# Altium PCB triumvi_integrated.PcbDoc (part 2 of 2)
Units mil, origin at the board's own origin, x right, y up, seen from the top; angles counter-clockwise.
Board outline 3610.03 x 1060.03 mil, 6 copper layers (Top Layer, GND, Signal Layer 2, VCC, GND (Mid4), Bottom Layer), stack 48.468 mil thick; 157 components, 128 nets, 572 pads, 236 vias.
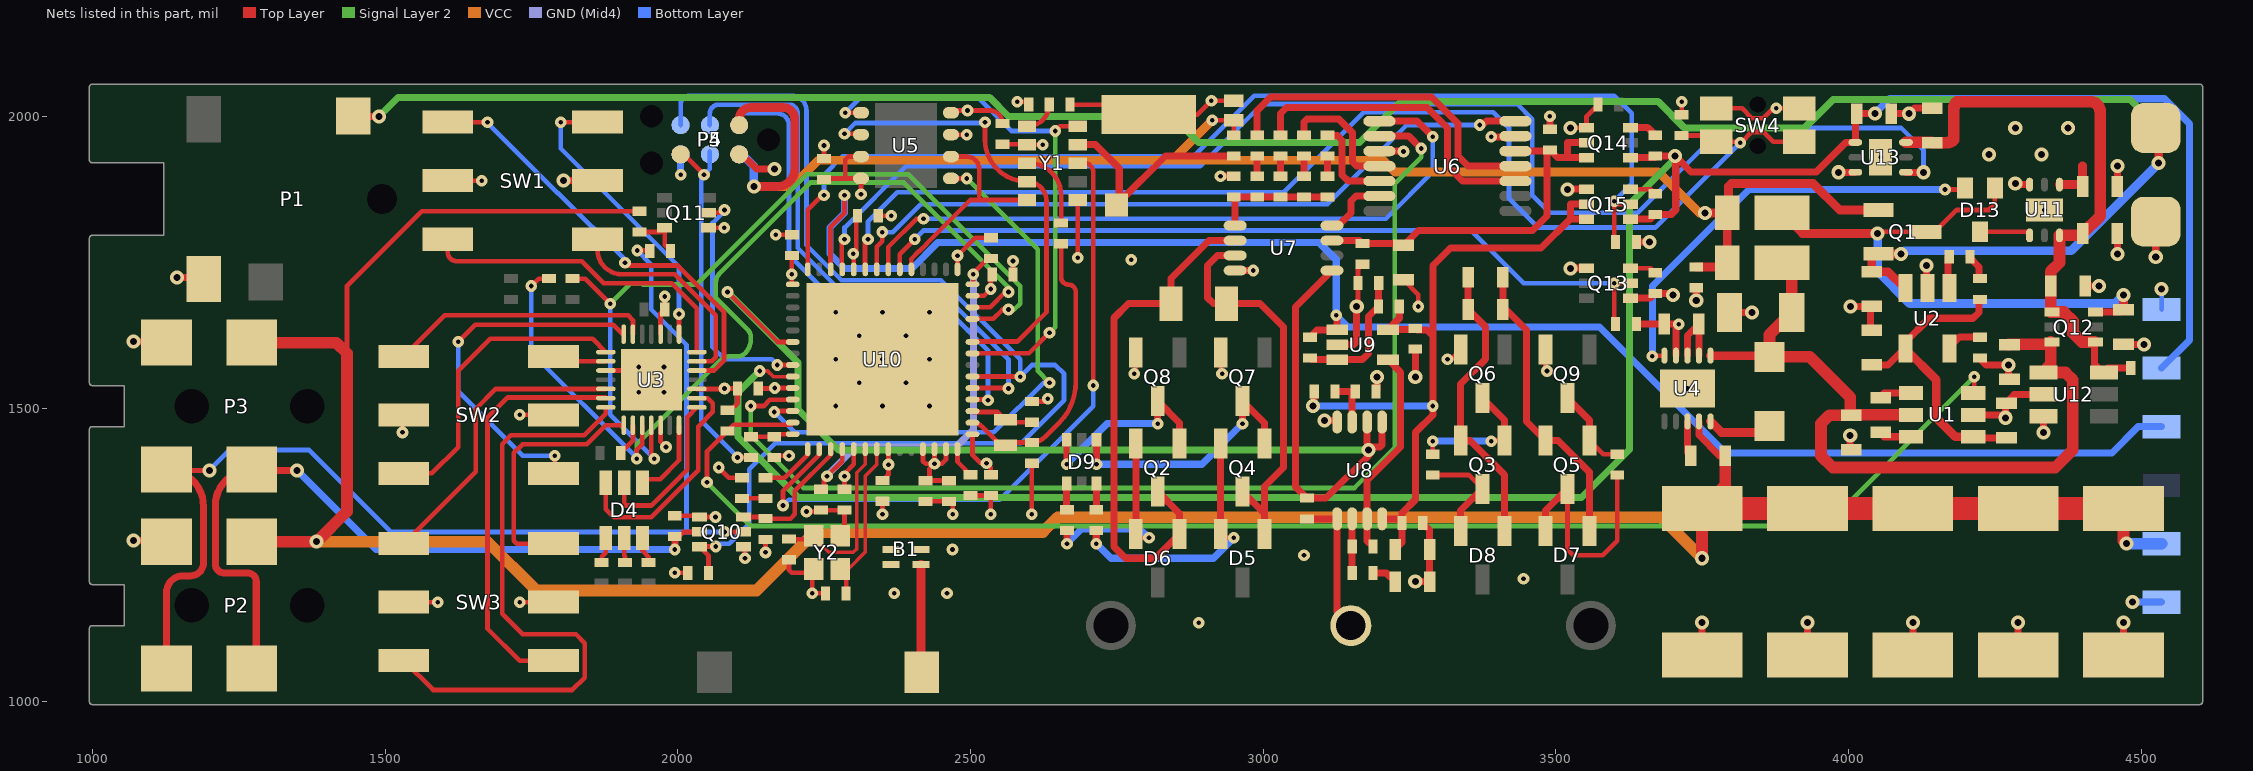
[diagram p6: the nets of this part, all layers, seen from the top]

## Via types
v1: diameter 20, hole 8, Top Layer to Bottom Layer, 154 vias
v2: diameter 24, hole 12, Top Layer to Bottom Layer, 66 vias
v3: diameter 22, hole 8, Top Layer to Bottom Layer, 14 vias
v4: diameter 21.65, hole 8, Top Layer to Bottom Layer, 2 vias

## Nets (pads, with @x,y where several pads share a name; then routed paths per layer and width w, separated by ;. In a path a pad name is that pad's centre, name@x,y a point inside that pad or via, vN(x,y) a via of type N, cw(c..) or ccw(c..) an arc to the next point about the centre after c; other vN are vias at no path point) (continued)
GND: B1.2 B1.5 B1.6 C2.1 C3.1 C4.2 C5.2 C6.2 C9.2 C10.2 C11.2 C12.2 C13.2 C15.2 C16.2 C17.2 C18.2 C19.2 C20.2 C21.2 C22.2 C23.2 C24.2 C25.2 C26.2 C27.2 C28.2 C29.2 C30.2 C31.2 C32.2 C33.2 C34.2 C35.2 C36.2 C37.2 C38.2 C39.2 C40.2 C41.2 C42.2 C43.2 C44.2 C45.2 C46.2 C47.2 C48.2 C49.2 C50.2 D10.1 P1.1 P2.1 P3.1 P4.5 P5.2 pad.@4525,1820 pad.@4535,1170 Q6.2 Q7.2 Q8.2 Q9.2 Q10.1 Q10.4 Q11.1 Q13.1 Q14.1 Q15.1 R2.2 R3.2 R4.2 R18.1 R32.2 R33.2 R43.2 R46.2 R49.2 R52.2 R53.2 SW1.C SW2.C SW3.C SW4.2 U1.2 U2.2 U3.3 U3.10 U3.17 U3.26 U3.29 U4.9 U4.11 U5.4 U6.3 U6.13 U7.4 U8.4 U9.2 U10.1 U10.57 U11.3 U11.7 U12.2 U12.3 U13.3 U13.7 Y1.6 Y2.2 Y2.4 | length 4551.4
  Top Layer w8: v1(1530,1460) 1530,1487.95 SW2.C@1532.05,1490 ; SW3.C@1532.05,1170 v1(1590,1170) ; SW1.C@1607.05,1890 v1(1665,1890) ; v1(1730,1170) SW3.C@1787.95,1170 ; v1(1730,1490) SW2.C@1787.95,1490 ; U3.17@1877.24,1565.75 1939.25,1565.75 U3.29@1955,1550 ; U3.26@1970.75,1472.24 1970.75,1444.25 v1(1980,1435) ; U3.10@1970.75,1627.76 1970.75,1663.03 C6.2@1977.72,1670 v1(1977.72,1692.28) ; R43.2@1995,1317.72 2035.47,1317.72 Q10.1@2037.6,1315.59 v1(2064.41,1315.59) ; U3.3@2032.76,1534.25 2079.25,1534.25 v1(2080,1535) C36.2@2102.28,1535 2102.28,1510 R4.2@2090,1497.72 ; Q11.1@2050,1807.01 Q11.1@2052.4,1809.41 v1(2079.41,1809.41) ; Q10.4@2112.4,1264.41 2115,1261.81 v1(2115,1245) ; C43.2@2165,1417.28 2167.72,1420 v1(2190,1420) ; v1(2167.28,1797.72) C34.2@2195,1797.72 ; C37.2@2190,1242.28 2190,1225 2195,1220 2225.91,1220 Y2.2@2230,1224.09 ; v1(2220,1325) 2242.72,1325 C30.2@2245,1327.28 C29.2@2285,1327.28 2285,1290.91 Y2.4@2277.64,1283.54 ; Y2.2@2232.36,1226.46 Y2.2@2230,1224.09 ; C17.2@2250,1927.72 v1(2250,1950) ; C38.2@2252.28,1185 v1(2230,1185) Y2.2@2230,1224.09 ; C32.2@2342.72,1830 v1(2365,1830) ; v1(2350,1320) C31.2@2350,1342.28 ; C33.2@2430,1342.28 2470,1342.28 v1(2470,1320) ; U5.4@2466.77,2006.1 2467.87,2005 2472.87,2010 v1(2495,2010) 2532.72,2010 cw(c2532.72,1987.72) 2542.05,2007.95 cw(c2532.72,1987.72) 2552.95,1997.05 cw(c2532.72,1987.72) C18.2@2555,1987.72 ; U10.1@2477.95,1738.54 v1(2477.95,1762.05) 2508.62,1792.72 C28.2@2535,1792.72 ; R46.2@2500,1352.28 C39.2@2535,1352.28 v1(2535,1320) ; C40.2@2572.72,1730 v1(2572.72,1752.72) ; v1(2605,1320) C42.2@2605,1402.28 ; C41.2@2605,1512.72 2627.28,1512.72 v1(2632.28,1517.72) ; R18.1@2670,2020 2792.24,2020 C19.2@2809.41,2002.83 ; Y1.6@2680.32,1860 Y1.6@2683.31,1857.01 v1(2683.31,1758.31) ; v1(2780,1560) 2782.6,1562.6 Q8.2@2782.6,1596.34 ; C19.2@2804.41,2002.83 C19.2@2809.41,2002.83 ; Q7.2@2927.6,1596.34 2927.6,1562.4 v1(2930,1560) ; D10.1@2950,2026.73 v1(2911.73,2026.73) 2887.83,2002.83 C19.2@2809.41,2002.83 ; v2(3160,1675) 3162.28,1677.28 R33.2@3162.28,1715 3162.28,1739.57 C22.2@3170,1747.28 ; C21.2@3240,1720.47 3265,1695.47 v1(3265,1675) ; v1(3315,1585) 3321.26,1585 Q6.2@3337.6,1601.34 ; Q9.2@3482.6,1601.34 3482.6,1567.4 v1(3485,1565) ; v2(3525,1740) v2@3525.59,1740.59 ; v2(3525,1980) 3525.59,1980.59 Q14.1@3552.6,1980.59 3552.6,2000.31 R52.2@3572.28,2020 ; SW4.2@3774.13,2013.54 3818.26,2013.54 3835.15,1996.65 3854.85,1996.65 3871.74,2013.54 v1(3876.46,2013.54) SW4.2@3915.87,2013.54
  Top Layer w12: v2(1070,1275) 1124.96,1275 P2.1@1126.69,1273.27 ; v2(1070,1615) 1124.96,1615 P3.1@1126.69,1613.27 ; P2.1@1125,1271.57 P2.1@1126.69,1273.27 ; P2.1@1128.43,1275 P2.1@1126.69,1273.27 ; v2(1145,1725) 1187.17,1725 P1.1@1190,1722.17 ; v2(1805,1890) SW1.C@1862.95,1890 ; P5.2@2105,1940 2135,1910 v2(2165,1910) ; v1(2927.28,1897.72) C23.2@2950,1897.72 ; U7.4@2952.32,1736.61 v1(2983.39,1736.61) ; v2(3105,1480) 3124.29,1480 U8.4@3126.61,1477.68 ; U9.2@3126.69,1610 3155,1610 3160,1615 v2(3160,1675) ; R32.2@3192.72,1530 3195,1532.28 v2(3195,1555) ; U6.3@3198.86,1940.59 3239.41,1940.59 v1(3240,1940) ; v2(3260,1205) C27.2@3284.53,1205 C26.2@3284.53,1260 3284.53,1293.19 C25.2@3272.72,1305 ; v2(3260,1555) C24.2@3260,1602.28 ; v1(3390,1965) 3429.96,1965 U6.13@3431.14,1966.18 ; C20.2@3490,1977.72 v1(3490,2000) ; v2(3520,1875) 3520.59,1875.59 Q15.1@3552.6,1875.59 ; v2@3525.59,1740.59 Q13.1@3552.6,1740.59 ; R49.2@3637.72,1645 C16.2@3685.47,1645 v1(3710,1645) 3705.32,1640.32 U4.9@3705.32,1591.1 ; R53.2@3637.72,1785 v2(3660,1785) ; v2(3740,1685) R3.2@3740,1707.28 ; C10.2@3750,1080 v2(3750,1135) ; C15.2@3796.85,1665 v2(3835,1665) ; C9.2@3930,1080 v2(3930,1135) ; v2(3983.31,1904.41) U13.3@4011.69,1904.41 ; C2.1@4003.05,1430.47 v2(4003.05,1455) ; v2(4003.52,1675.47) 4038.05,1675.47 C4.2@4038.05,1634.53 ; C49.2@4073.31,2004.41 v2(4103.31,2004.41) 4112.83,2013.94 C50.2@4143.31,2013.94 ; C11.2@4110,1080 v2(4110,1135) ; U2.2@4133.05,1706.57 v2(4133.05,1745) ; U1.2@4211.2,1490 U1.2@4213.15,1490 4263.05,1490 v2(4268.05,1485) 4268.05,1509.53 4283.52,1525 ; R2.2@4223.05,1587.28 4235.34,1575 v2(4273.05,1575) C47.2@4273.05,1550.47 ; 4283.05,1525 4283.52,1525 ; v2(4285,1885) 4286.69,1883.31 U11.3@4309.41,1883.31 ; C12.2@4290,1080 v2(4290,1135) ; U12.3@4331.48,1487.6 4333.05,1486.02 v2(4333.05,1460) ; U12.2@4331.48,1525 4283.52,1525 ; C48.2@4402.58,1710 C48.2@4404.53,1710 v2(4428.05,1710) ; C45.2@4459.53,1800 4459.53,1765.47 v2(4460,1765) ; C46.2@4459.53,1880 4459.53,1914.53 v2(4460,1915) ; C44.2@4468.05,1610.47 C44.2@4470,1610.47 4504.53,1610.47 v2(4505,1610) ; C13.2@4470,1080 v2(4470,1135) ; v2(4525,1760) pad.@4525,1820
  Bottom Layer w12: v1(2005,1900) P4.5@2005,1935 P4.5@2005,1940 ; v2(4485,1170) pad.@4535,1170
  other v1: 2890,1135 2370,1185 2460,1185 3445,1210 3070,1250 2469.4,1260 1933.35,1528.35 1976.65,1528.35 1933.35,1571.65 1976.65,1571.65 2775,1755
  other v3: 2270,1505 2350,1505 2430,1505 3725,1535 2310,1545 2390,1545 2270,1585 2350,1585 2430,1585 2310,1625 2390,1625 2270,1665 2350,1665 2430,1665
  other v4: 4335,1840 4055,1930
I2C_SCL: R10.2 U3.25 U10.53 | length 1432.7
  Top Layer w8: R10.2@1820,1722.72 1842.28,1722.72 v1(1885,1680) ; U3.25@1955,1472.24 1955,1420 v1(1960,1415) ; U10.53@2503.54,1653.9 2538.9,1653.9 2555,1670 v1(2565,1670)
  Signal Layer 2 w8: v1(1885,1680) 1920,1715 1938.28,1715 1940.57,1712.72 2032.72,1712.72 2220.77,1900.77 2394.23,1900.77 2585,1710 2585,1680 2575,1670 v1(2565,1670)
  Bottom Layer w8: v1(1885,1680) 1885,1490 v1(1960,1415)
I2C_SDA: R9.2 U3.24 U10.54 | length 1607.1
  Top Layer w8: v1(1750,1710) 1762.72,1722.72 R9.2@1780,1722.72 ; v1(1930,1415) 1930,1430.75 1939.25,1440 U3.24@1939.25,1472.24 ; U10.54@2503.54,1673.58 2533.58,1673.58 2560,1700 v1(2565,1700)
  Signal Layer 2 w8: v1(1930,1415) 1930,1440 2072.93,1582.93 cw(c2090,1565.86) 2090,1590 2102.93,1590 ccw(c2102.93,1607.07) 2115,1595 ccw(c2090.86,1619.14) 2125,1619.14 2125,1622.93 ccw(c2107.93,1622.93) 2120,1635 2065,1690 2065,1715 cw(c2089.14,1715) 2072.07,1732.07 2226.77,1886.77 2386.51,1886.77 2565,1708.28 v1(2565,1700)
  Bottom Layer w8: v1(1750,1710) 1750,1596.5 v1@1925,1421.5
IN+: D5.1 Q4.3 R16.1 U7.3 | length 680.2
  Top Layer w12: U7.3@2952.32,1762.2 2922.2,1762.2 2905,1745 2905,1690 2915,1680 R16.1@2937.24,1680 2995,1680 3035,1640 3035,1400 3002.4,1367.4 3002.4,1321.26 ; Q4.3@2965,1358.66 3002.4,1321.26 ; D5.1@3002.4,1286.34 3002.4,1321.26
IN-: D6.1 Q2.3 R16.2 U7.2 | length 903
  Top Layer w12: Q2.3@2820,1358.66 2857.4,1321.26 D6.1@2857.4,1286.34 2816.06,1245 2765,1245 2745,1265 2745,1655 2770,1680 R16.2@2842.76,1680 2842.76,1722.76 2907.8,1787.8 U7.2@2952.32,1787.8
LDO_EN: D13.3 U11.4 | length 86.9
  Top Layer w8: D13.3@4225,1802.6 4303.5,1802.6 U11.4@4309.41,1796.69
NetANT1_1: ANT1.1 B1.1 | length 185.1
  Top Layer w8: ANT1.1@2415.59,1051.57 ANT1.1@2417.17,1050
  Top Layer w15: ANT1.1@2415.59,1051.57 B1.1@2415.59,1234.41
NetC1_1: C1.1 U1.4 | length 55.1
  Top Layer w12: C1.1@4053.05,1519.53 4060.93,1527.4 U1.4@4104.9,1527.4
NetC1_2: C1.2 U1.6 | length 55.1
  Top Layer w12: C1.2@4053.05,1460.47 4060.93,1452.6 U1.6@4104.9,1452.6
NetC3_2: C3.2 C4.1 D2.1 U1.1 U2.4 | length 524.2
  Top Layer w12: C4.1@4038.05,1575.47 C4.1@4040,1575.47 4067.7,1575.47 4095.65,1603.43 4095.65,1612.6 4138.05,1655 4213.05,1655 4223.05,1665 D2.1@4223.05,1687.28 ; U1.1@4211.2,1452.6 4213.33,1450.47 C3.2@4268.05,1450.47
  Top Layer w15: U2.4@4097.6,1603.43 4097.6,1602.4 4150,1550 4150,1485 4182.4,1452.6 4211.2,1452.6 U1.1@4213.15,1452.6
NetC7_1: C7.1 C8.1 D7.1 Q5.2 | length 510.5
  Top Layer w12: C7.1@3409.53,1725 C8.1@3409.53,1670 3415,1670 3450,1635 3450,1478.94 Q5.2@3482.6,1446.34 3503.66,1446.34 3533.59,1416.41 3533.59,1415.78 3557.4,1391.97 D7.1@3557.4,1291.34
NetC7_2: C7.2 C8.2 D8.1 Q3.2 | length 503.8
  Top Layer w12: C7.2@3350.47,1725 C8.2@3350.47,1670 3380,1640.47 3380,1585 3337.6,1542.6 Q3.2@3337.6,1446.34 3353.66,1446.34 3412.4,1387.6 D8.1@3412.4,1291.34
NetC14_2: C14.2 U4.3 | length 61.2
  Top Layer w12: U4.3@3725,1478.9 3725,1425.47 C14.2@3730.47,1420
NetC16_1: C16.1 U4.7 U4.8 | length 115.9
  Top Layer w12: U4.8@3725,1591.1 3725,1625.47 C16.1@3744.53,1645 3744.68,1644.84 U4.7@3744.68,1591.1
NetC19_1: C19.1 R19.2 Y1.9 | length 385.8
  Top Layer w8: C19.1@2749.29,1848.31 2754.29,1853.31 C19.1@2754.29,1848.31
  Top Layer w12: Y1.9@2683.31,1951.5 2713.5,1951.5 2754.29,1910.71 2754.29,1853.31 2833.27,1932.28 R19.2@2950,1932.28
NetC27_1: C27.1 R35.2 | length 44
  Top Layer w12: R35.2@3187.72,1220 3210.47,1220 C27.1@3225.47,1205
NetC28_1: C28.1 C30.1 U10.32 U10.56 | length 692.3
  Top Layer w8: C30.1@2245,1362.72 2250,1367.72 2250,1380 v1(2255,1385) 2281.1,1411.1 U10.32@2281.1,1431.46 ; U10.56@2503.54,1712.95 2505,1714.41 v1(2505,1730) 2505,1731.54 2530.74,1757.28 C28.1@2535,1757.28
  GND (Mid4) w12: v1(2255,1385) 2255,1386.11 2303.89,1435 2475,1435 2505,1465 v1(2505,1730)
NetC37_1: C37.1 U10.34 Y2.1 | length 311.5
  Top Layer w6: Y2.1@2232.36,1283.54 2232.36,1280.66 2258.02,1255 2300,1255 2305.81,1260.81 2305.81,1390.81 2320.47,1405.47 U10.34@2320.47,1431.46
  Top Layer w8: C37.1@2190,1277.28 2226.1,1277.28 Y2.1@2232.36,1283.54 ; U10.34@2320,1431.46 U10.34@2320.47,1431.46
NetC38_1: C38.1 U10.35 Y2.3 | length 284.8
  Top Layer w6: Y2.3@2277.64,1226.46 2291.46,1226.46 2320,1255 2320,1385 2340.16,1405.16 U10.35@2340.16,1431.46
  Top Layer w8: Y2.3@2277.64,1226.46 2287.72,1216.38 C38.1@2287.72,1185 ; U10.35@2340,1431.3 U10.35@2340.16,1431.46
NetC41_1: C41.1 U10.45 Y3.2 | length 109.8
  Top Layer w8: U10.45@2503.54,1496.42 2504.96,1495 2538.28,1495 2538.78,1495.5 2546.16,1495.5 Y3.2@2560,1481.65 2564.37,1477.28 C41.1@2605,1477.28
NetC42_1: C42.1 R44.1 U10.44 Y3.1 | length 504.2
  Top Layer w8: U10.44@2503.54,1476.73 cw(c2503.54,1453.26) 2520.14,1469.86 2545.75,1444.25 ccw(c2560,1458.5) 2559.63,1438.35 ccw(c2560,1458.5) Y3.1@2560,1438.35 2564.37,1442.72 C42.1@2605,1442.72 ccw(c2605,1473.42) 2626.71,1451.71 2651.72,1476.72 ccw(c2583.43,1545) 2674.13,1511.85 ccw(c2583.43,1545) 2680,1545 2680,1700 ccw(c2667.5,1700) 2667.5,1712.5 cw(c2667.5,1725) 2655,1725 R44.1@2655,1782.28
NetC43_1: C43.1 R45.1 U10.28 | length 71.5
  Top Layer w8: R45.1@2125,1452.72 C43.1@2165,1452.72 ; C43.1@2165,1457.05 U10.28@2196.46,1457.05
NetD2_2: D2.2 R1.1 | length 44.4
  Top Layer w12: R1.1@4205.77,1760 4223.05,1742.72 D2.2@4223.05,1722.72
NetD4_1: D4.1 U3.28 | length 135.6
  Top Layer w8: D4.1@1940,1380 1970,1380 2002.24,1412.24 U3.28@2002.24,1472.24
NetD4_2: D4.2 U3.1 | length 290.6
  Top Layer w8: D4.2@1908.5,1380 D4.2@1908.5,1373.94 1908.5,1336.5 1910,1335 1955,1335 2016.24,1396.24 2016.24,1486.24 U3.1@2032.76,1502.76
NetD4_3: D4.3 U3.2 | length 404
  Top Layer w8: D4.3@1877.01,1380 D4.3@1877.01,1373.94 1877.01,1329.11 1891.12,1315 1955,1315 2035,1395 2035,1470 2060,1495 2060,1510 2051.5,1518.5 U3.2@2032.76,1518.5
NetD4_4: D4.4 R8.2 | length 48.6
  Top Layer w8: 1870,1247.72 1877.01,1254.72 D4.4@1877.01,1279.45 D4.4@1877.01,1293.39
NetD4_5: D4.5 R7.2 | length 46.3
  Top Layer w8: D4.5@1908.5,1293.39 D4.5@1908.5,1279.45 1908.5,1249.21 1910,1247.72
NetD4_6: D4.6 R6.2 | length 49.8
  Top Layer w8: D4.6@1940,1293.39 D4.6@1940,1279.45 1940,1257.72 1950,1247.72
NetD5_2: D5.2 Q4.2 R12.1 | length 462.2
  Top Layer w8: D5.2@2927.6,1286.34 2933.94,1280 v1(2950,1280)
  Top Layer w12: v1(2715,1270) R12.1@2715,1292.28 ; D5.2@2927.6,1286.34 Q4.2@2927.6,1441.34
  Bottom Layer w12: v1(2715,1270) 2740,1245 2915,1245 v1(2950,1280)
NetD6_2: D6.2 Q2.2 R13.1 | length 350.2
  Top Layer w8: D6.2@2782.6,1286.34 2788.94,1280 v1(2805,1280)
  Top Layer w12: v1(2665,1270) R13.1@2665,1292.28 ; D6.2@2782.6,1295 Q2.2@2782.6,1441.34
  Bottom Layer w12: v1(2665,1270) 2690,1295 2790,1295 v1(2805,1280)
NetD7_2: D7.2 Q5.3 R14.1 | length 403.3
  Top Layer w8: Q5.3@3520,1363.66 3520,1260 3530,1250 3580,1250 3605,1275 R14.1@3605,1387.28
  Top Layer w12: D7.2@3482.6,1291.34 3482.6,1326.26 Q5.3@3520,1363.66
NetD8_2: D8.2 Q3.3 R15.1 | length 182.6
  Top Layer w8: R15.1@3290,1387.28 3351.38,1387.28 Q3.3@3375,1363.66
  Top Layer w12: D8.2@3337.6,1291.34 3337.6,1326.26 Q3.3@3375,1363.66
NetD9_1: D9.1 Q4.1 Q7.3 | length 446.4
  Top Layer w12: v1(2715.59,1405.59) D9.1@2715.59,1447.4 ; v1(2965,1475) Q7.3@2965,1513.66 3002.4,1476.26 Q4.1@3002.4,1441.34
  Bottom Layer w12: v1(2715.59,1405.59) 2895.59,1405.59 v1(2965,1475)
NetD9_3: D9.3 Q2.1 Q8.3 | length 352.6
  Top Layer w10: v1(2664.41,1405.59) D9.3@2664.41,1447.4
  Top Layer w12: v1(2820,1475) Q8.3@2820,1513.66 2857.4,1476.26 Q2.1@2857.4,1441.34
  Bottom Layer w12: v1(2664.41,1405.59) 2733.82,1475 v1(2820,1475)
NetD9_4: D9.4 R13.2 | length 45.1
  Top Layer w12: D9.4@2664.41,1372.6 2664.41,1328.31 R13.2@2665,1327.72
NetD9_6: D9.6 R12.2 | length 45.1
  Top Layer w12: R12.2@2715,1327.72 2715.59,1328.31 D9.6@2715.59,1372.6
NetD11_1: D11.1 R41.1 | length 40
  Top Layer w8: R41.1@2110,1347.28 D11.1@2150,1347.28
NetL1_2: L1.2 U4.5 | length 113
  Top Layer w15: U4.5@3764.37,1478.9 3783.27,1460 3854.06,1460 L1.2@3865,1470.94
NetQ3_1: Q3.1 Q6.3 R15.2 | length 233.1
  Top Layer w8: R15.2@3290,1422.72 v1(3290,1445) ; v1(3390,1445) 3391.34,1446.34 Q3.1@3412.4,1446.34
  Top Layer w12: Q6.3@3375,1518.66 3412.4,1481.26 Q3.1@3412.4,1446.34
  Bottom Layer w12: v1(3290,1445) v1(3390,1445)
NetQ5_1: Q5.1 Q9.3 R14.2 | length 145.2
  Top Layer w8: Q5.1@3557.4,1446.34 3581.02,1422.72 R14.2@3605,1422.72
  Top Layer w12: Q9.3@3520,1518.66 3557.28,1481.38 3557.28,1475.12 3557.4,1475 Q5.1@3557.4,1446.34
NetQ10_6: Q10.6 R42.2 U10.31 | length 232.2
  Top Layer w8: Q10.6@2112.4,1315.59 R42.2@2142.13,1315.59 ; R42.2@2147.13,1315.59 R42.2@2142.13,1315.59 ; R42.2@2147.5,1315.22 2145,1312.72 R42.2@2142.13,1315.59 ; R42.2@2150,1312.72 2192.72,1312.72 2200,1320 2200,1360 2261.42,1421.42 U10.31@2261.42,1431.46
NetQ11_2: Q11.2 U10.22 | length 422.3
  Top Layer w8: Q11.2@2052.4,1835 2075,1835 v1(2080,1840) ; v1(2170.16,1575.16) U10.22@2196.46,1575.16
  Bottom Layer w8: v1(2080,1840) 2080,1838.28 2059.41,1817.69 2059.41,1605.59 2080,1585 2160.32,1585 v1(2170.16,1575.16)
NetQ13_5: Q13.5 R49.1 U10.6 | length 1398.8
  Top Layer w8: U10.6@2379.53,1738.54 2379.53,1764.53 v1(2405,1790) ; R49.1@3602.28,1645 3600,1647.28 v1(3600,1715) Q13.5@3627.4,1715
  Bottom Layer w8: v1(2405,1790) 2420,1805 3355,1805 3445,1715 v1(3600,1715)
NetQ13_6: Q13.6 R48.2 | length 45.9
  Top Layer w8: Q13.6@3627.4,1740.59 3662.13,1740.59 R48.2@3670,1732.72
NetQ14_6: Q14.6 R50.2 | length 50.3
  Top Layer w12: Q14.6@3625,1980.59 Q14.6@3627.4,1980.59 3657.13,1980.59 R50.2@3670,1967.72
NetQ15_6: Q15.6 R51.2 | length 45.9
  Top Layer w8: Q15.6@3627.4,1875.59 3662.13,1875.59 R51.2@3670,1867.72
NetR1_2: R1.2 U2.1 | length 53.5
  Top Layer w12: R1.2@4170.34,1760 4170.34,1706.69 U2.1@4170.45,1706.57
NetR2_1: R2.1 U2.5 | length 60.6
  Top Layer w12: U2.5@4170.45,1603.43 4189.74,1622.72 R2.1@4223.05,1622.72
NetR4_1: R4.1 U1.3 U10.27 | length 2549.3
  Top Layer w8: v1(2050,1375) 2050,1427.28 R4.1@2085,1462.28 2095.72,1473 2192.72,1473 U10.27@2196.46,1476.73 ; U1.3@4213.15,1527.4 4215,1529.25 v1(4215,1555)
  Signal Layer 2 w8: v1(2050,1375) 2125,1300 3960,1300 v1(4215,1555)
NetR11_2: R11.2 U3.23 | length 57.6
  Top Layer w8: R11.2@1900.22,1425 R11.2@1901.47,1426.25 ; R11.2@1902.72,1425 1923.5,1445.79 U3.23@1923.5,1472.24
NetR17_1: R17.1 R18.2 Y1.1 | length 59
  Top Layer w8: Y1.1@2596.69,1982.99 2597.56,1982.99 ccw(c2597.56,2020) R18.2@2634.57,2020
NetR20_2: R20.2 R21.1 | length 34.6
  Top Layer w12: R20.2@3070,1897.72 R21.1@3070,1932.28
NetR21_2: R21.2 U6.4 | length 215.6
  Top Layer w12: R21.2@3070,1967.72 3070,1990 3075,1995 3130,1995 3153,1972 3153,1922 3160,1915 U6.4@3198.86,1915
NetR22_2: R22.2 R23.1 | length 34.6
  Top Layer w12: R22.2@3110,1897.72 R23.1@3110,1932.28
NetR23_2: R23.2 U6.5 | length 150.8
  Top Layer w12: R23.2@3110,1967.72 R23.2@3110.72,1967 ; R23.2@3115.72,1967 3126.86,1967 3135,1958.86 3135,1900 3145.59,1889.41 U6.5@3198.86,1889.41
NetR24_2: R24.2 R25.1 | length 34.6
  Top Layer w12: R24.2@2990,1897.72 R25.1@2990,1932.28
NetR25_2: R25.2 U6.11 | length 574.3
  Top Layer w12: R25.2@2990,1967.72 2990,2010 3013,2033 3287.46,2033 3333,1987.46 3333,1932 3350,1915 U6.11@3431.14,1915
NetR26_2: R26.2 R27.1 | length 34.6
  Top Layer w12: R26.2@3030,1897.72 R27.1@3030,1932.28
NetR27_2: R27.2 U6.10 | length 532.7
  Top Layer w12: R27.2@3030,1967.72 3030,2005 3040,2015 3280,2015 3315,1980 3315,1915 3340.59,1889.41 U6.10@3431.14,1889.41
NetR28_2: R28.2 R29.1 R33.1 U9.3 | length 228.7
  Top Layer w12: R29.1@3082.87,1584.41 U9.3@3126.69,1584.41 3169.41,1584.41 3180,1595 3180,1657.72 R28.2@3197.28,1675 R33.1@3197.28,1715
NetR34_1: R34.1 R35.1 U8.6 | length 92.4
  Top Layer w12: U8.6@3152.2,1312.32 3152.2,1265.08 R34.1@3152.28,1265 R35.1@3152.28,1220
NetR40_2: R40.2 SW4.1 U10.9 | length 2083.7
  Top Layer w8: U10.9@2320.47,1738.54 2320,1739.02 2320,1785 v1(2325,1790) ; R40.2@3715,1967.28 3763.31,1967.28 SW4.1@3774.13,1956.46 3813.54,1956.46 v1(3815,1955) 3816.8,1955 3835.15,1973.35 3854.85,1973.35 3871.74,1956.46 SW4.1@3915.87,1956.46
  Bottom Layer w8: v1(2325,1790) 2325,1820 2375,1870 3035,1870 3172,2007 3393,2007 3420,1980 3420,1860 3470,1810 3670,1810 v1(3815,1955)
NetR46_1: R46.1 U10.42 | length 52.9
  Top Layer w8: U10.42@2477.95,1431.46 2477.95,1409.76 R46.1@2500,1387.72
NetSW1_1: SW1.1 U3.5 | length 746.4
  Top Layer w8: SW1.1@1607.05,1990 v1(1675,1990) ; v1(1910,1750) 1915,1745 1999.8,1745 2079,1665.8 2079,1582.28 2062.46,1565.75 U3.5@2032.76,1565.75
  Bottom Layer w8: v1(1675,1990) 1675,1988.89 1795.89,1868 1797,1868 1910,1755 v1(1910,1750)
NetSW1_2: SW1.2 U3.6 | length 379.9
  Top Layer w8: SW1.2@1862.95,1790 1862.95,1772.05 ccw(c1905,1772.05) 1905,1730 1995,1730 2065,1660 2065,1588.08 2058.41,1581.5 U3.6@2032.76,1581.5
NetSW1_4: SW1.4 U3.7 | length 564.8
  Top Layer w8: SW1.4@1607.05,1790 1607.05,1767.95 ccw(c1622.5,1767.95) 1622.5,1752.5 1835.78,1752.5 1873.28,1715 1990,1715 2032.76,1672.24 U3.7@2032.76,1597.24
NetSW1_8: SW1.8 U3.8 | length 509
  Top Layer w8: v1(1800,1990) SW1.8@1862.95,1990 ; U3.8@2002.24,1627.76 v1(2002.24,1662.24)
  Bottom Layer w8: v1(1800,1990) 1800,1945 2002.24,1742.76 v1(2002.24,1662.24)
NetSW2_1: SW2.1 U3.13 | length 447.9
  Top Layer w8: SW2.1@1532.05,1590 1602.05,1660 1915.28,1660 1923.5,1651.78 U3.13@1923.5,1627.76
NetSW2_2: SW2.2 U3.14 | length 627.9
  Top Layer w8: v1(1625,1615) 1654,1644 1889.51,1644 1905.76,1627.76 U3.14@1907.76,1627.76 ; SW2.2@1787.95,1390 1790,1392.05 v1(1790,1420)
  Bottom Layer w8: v1(1625,1615) 1625,1530 1735,1420 v1(1790,1420)
NetSW2_4: SW2.4 U3.15 | length 526
  Top Layer w8: SW2.4@1532.05,1390 1580,1390 1625,1435 1625,1565 1680,1620 1854.49,1620 U3.15@1877.24,1597.24
NetSW2_8: SW2.8 U3.16 | length 92.8
  Top Layer w8: SW2.8@1787.95,1590 1796.46,1581.5 U3.16@1877.24,1581.5
NetSW3_1: SW3.1 U3.19 | length 517.4
  Top Layer w8: SW3.1@1532.05,1270 1655,1392.95 1655,1500 1689.25,1534.25 U3.19@1877.24,1534.25
NetSW3_2: SW3.2 U3.20 | length 713.5
  Top Layer w8: SW3.2@1787.95,1070 1730,1070 1675,1125 1675,1485 1709.69,1519.69 1877.24,1519.69 U3.20@1877.24,1518.5
NetSW3_4: SW3.4 U3.21 | length 1058.8
  Top Layer w8: SW3.4@1532.05,1070 1582.05,1020 1820,1020 1841.26,1041.26 1841.26,1100 1826.26,1115 1735,1115 1700,1150 1700,1440 1715,1455 1840,1455 1877.24,1492.24 U3.21@1877.24,1502.76
NetSW3_8: SW3.8 U3.22 | length 433.4
  Top Layer w8: SW3.8@1790,1272.05 SW3.8@1787.95,1270 1725,1270 1720,1275 1720,1425 1735,1440 1845,1440 1877.24,1472.24 U3.22@1907.76,1472.24 U3.22@1905.51,1470
NetU5_1: U5.1 U10.26 | length 986.2
  Top Layer w8: v1(2165,1495) 2166.42,1496.42 U10.26@2196.46,1496.42 ; U5.1@2466.77,1893.9 v1(2493.9,1893.9)
  Signal Layer 2 w8: v1(2493.9,1893.9) 2615,1772.8 2615,1565 v1(2635,1545)
  Bottom Layer w8: v1(2165,1495) 2200,1460 2540,1460 2625,1545 v1(2635,1545)
NetU10_11: U10.11 U13.4 | length 2301.1
  Top Layer w8: U10.11@2281.1,1738.54 2280,1739.65 2280,1785 v1(2285,1790)
  Top Layer w12: U13.4@4098.31,1904.41 v2(4128.31,1904.41)
  Bottom Layer w8: v1(2285,1790) 2285,1810 2390,1915 2892.5,1915 2998.5,2021 3434,2021 3460,1995 3460,1865 3490,1835 3640,1835 3785,1980 4090,1980 4128.31,1941.69 v2(4128.31,1904.41)
PD3: D11.2 U10.29 | length 97.7
  Top Layer w8: D11.2@2150,1382.72 2182.72,1382.72 2222.05,1422.05 U10.29@2222.05,1431.46
PGOOD: D13.2 U4.10 | length 744.8
  Top Layer w8: v1(3665,1590) 3666.1,1591.1 U4.10@3685.63,1591.1 ; v1(4165,1875) 4197.01,1875 D13.2@4199.41,1877.4
  Bottom Layer w12: v1(3665,1590) 3665,1710 3830,1875 v1(4165,1875)
R\D\Y\_\I\N\: D12.2 P2.2 P3.2 Q10.5 | length 1998.6
  Top Layer w8: P3.2@1141.4,1395 v2(1200,1395) ; v1(1930.88,1770.88) 1951.4,1770.88 D12.2@1952.28,1770 ; v1(2080,1290) Q10.5@2112.4,1290
  Top Layer w12: P2.2@1126.69,1056.73 1126.69,1186.69 cw(c1155,1186.69) 1155,1215 1167.5,1215 ccw(c1167.5,1237.5) 1190,1237.5 1190,1333.43 ccw(c1126.69,1333.43) 1141.4,1395 ccw(c1126.69,1333.43) 1131.93,1396.52 ccw(c1126.69,1333.43) P3.2@1126.69,1396.73
  Bottom Layer w8: v2(1200,1395) 1235,1430 1370,1430 1510,1290 2015,1290 ; v1(1930.88,1770.88) 1955,1746.77 1955,1670 2015,1610 2015,1290 ; v1(2080,1290) 2015,1290
R\E\A\D\Y\: D12.1 Q11.6 R36.2 | length 89.2
  Top Layer w8: R36.2@1935,1802.28 1970.47,1802.28 Q11.6@1977.6,1809.41 1977.6,1780.12 D12.1@1987.72,1770
R\E\S\E\T\: P4.3 P5.6 R45.2 | length 634
  Top Layer w8: P5.6@2005,1940 v1(2045,1900) ; v1(2102.28,1417.28) R45.2@2125,1417.28
  Bottom Layer w8: P4.3@2055,1940 P4.3@2055,1935 2055,1910 v1(2045,1900) 2040,1895 2040,1479.57 v1(2102.28,1417.28)
RG1: C23.1 R20.1 R22.1 R24.1 R26.1 U7.1 | length 209.9
  Top Layer w12: U7.1@2952.32,1813.39 2952.32,1859.96 C23.1@2950,1862.28 R24.1@2990,1862.28 R26.1@3030,1862.28 R20.1@3070,1862.28 R22.1@3110,1862.28
RG2: U6.6 U7.8 | length 113.8
  Top Layer w12: U7.8@3117.68,1813.39 3128.39,1813.39 3150,1835 3150,1855 3158.82,1863.82 U6.6@3198.86,1863.82
RTC_CLKOUT: R44.2 Y1.3 | length 137
  Top Layer w8: Y1.3@2596.69,1920 2600,1920 cw(c2600,1865) 2627.19,1912.81 cw(c2600,1865) 2647.81,1892.19 cw(c2600,1865) 2655,1865 R44.2@2655,1817.72
RTC_CS: U10.30 Y1.8 | length 1157.7
  Top Layer w8: v1(2180,1335) 2180,1360.2 2241.73,1421.93 U10.30@2241.73,1431.46 ; Y1.8@2683.31,1920 2695,1920 cw(c2695,1905) 2710,1905 v1(2710,1540)
  Bottom Layer w8: v1(2180,1335) 2190,1345 2550,1345 2710,1505 v1(2710,1540)
SPI_CLK: U5.6 U10.51 Y1.4 | length 808.8
  Top Layer w8: v1(2285,1970) 2311.93,1970 U5.6@2313.23,1968.7 ; U10.51@2503.54,1614.53 2504.17,1615.16 2580.16,1615.16 2630,1665 2630,1855.2 ccw(c2596.69,1855.2) 2625,1872.75 ccw(c2596.69,1855.2) Y1.4@2596.69,1888.5 cw(c2596.69,1960.2) 2525,1960.2 v1(2525,1990)
  Bottom Layer w8: v1(2285,1970) 2303.7,1988.7 v1@2525,1988.7
SPI_MISO: U5.2 U10.5 Y1.5 | length 372.3
  Top Layer w8: U10.5@2399.21,1738.54 2399.21,1756.22 2412.99,1770 2413.28,1770 2425,1781.72 2425,1782.01 2500,1857.01 2515,1857.01 ; U5.2@2468.07,1930 U5.2@2466.77,1931.3 2493.7,1931.3 cw(c2493.7,1910) 2515,1910 2515,1857.01 ; Y1.5@2596.69,1857.01 2515,1857.01
SPI_MOSI: U5.5 U10.50 Y1.10 | length 955.5
  Top Layer w8: v1(2286.1,2006.1) U5.5@2313.23,2006.1 ; U10.50@2503.54,1594.84 2503.86,1595.16 2600.16,1595.16 v1(2635,1630) ; v1(2645,1975) 2652.99,1982.99 Y1.10@2683.31,1982.99
  Signal Layer 2 w8: v1(2635,1630) 2645,1640 v1(2645,1975)
  Bottom Layer w8: v1(2286.1,2006.1) 2310,2030 2515,2030 2570,1975 v1(2645,1975)
SW_A0: U6.1 U10.7 | length 1183.9
  Top Layer w8: U10.7@2360,1738.7 U10.7@2359.84,1738.54 2359.84,1776.76 2408.08,1825 v1(2420,1825)
  Top Layer w12: U6.1@3198.86,1991.77 3263.23,1991.77 v1(3290,1965)
  Bottom Layer w8: v1(2420,1825) 3210,1825 3290,1905 v1(3290,1965)
SW_A1: U6.14 U10.8 | length 1227.6
  Top Layer w8: U10.8@2340.16,1738.54 2340.16,1776.87 2349.58,1786.3 v1(2349.58,1802.19)
  Top Layer w12: v1(3370,1985) 3375,1985 3381.77,1991.77 U6.14@3431.14,1991.77
  Bottom Layer w8: v1(2349.58,1802.19) 2367.19,1802.19 2415,1850 3110,1850 3245,1985 v1(3370,1985)
SW_EN: U6.2 U10.25 | length 1901.5
  Top Layer w8: v1(2125,1505) 2146.72,1505 2157.5,1515.79 2196.14,1515.79 U10.25@2196.46,1516.1
  Top Layer w12: U6.2@3198.86,1966.18 3248.82,1966.18 v1(3270,1945)
  Signal Layer 2 w8: v1(2125,1505) 2125,1455 2215,1365 3156.11,1365 3225,1433.89 3225,1885 3270,1930 v1(3270,1945)
TCK: P4.4 U10.47 | length 967.6
  Top Layer w8: U10.47@2503.54,1535.79 2564.21,1535.79 v1(2565,1535)
  Bottom Layer w8: P4.4@2055,1985 2055,2005 cw(c2070,2005) 2070,2020 2190,2020 cw(c2190,2005) 2205,2005 2205,1775 2275,1705 2445,1705 2565,1585 v1(2565,1535)
TDO: P4.6 Q10.3 R37.2 U10.48 | length 2026.3
  Top Layer w8: R37.2@2052.72,1220 2052.72,1249.29 Q10.3@2037.6,1264.41 2038.19,1265 v1(2065,1265) ; U10.48@2503.54,1555.47 2584.53,1555.47 v1(2585,1555)
  Bottom Layer w8: P4.6@2005,1985 2005,2020 cw(c2020,2020) 2020,2035 2195,2035 cw(c2195,2010) 2220,2010 2220,1779.8 2279.8,1720 2449.8,1720 2585,1584.8 v1(2585,1555) 2605,1575 2645,1575 2660,1560 2660,1515 2586.5,1441.5 2166.5,1441.5 2122.28,1397.28 2122.28,1304 2088.28,1270 2070,1270 v1(2065,1265)
TMS: P4.2 U10.46 | length 857.1
  Top Layer w8: U10.46@2504.65,1515 U10.46@2503.54,1516.1 2528.9,1516.1 v1(2530,1515)
  Bottom Layer w8: P4.2@2105,1985 2105,2000 cw(c2110,2000) 2110,2005 2170,2005 cw(c2170,1985) 2190,1985 2190,1763.28 2263.28,1690 2440,1690 2530,1600 v1(2530,1515)
V_BATT: C5.1 P1.4 pad.@4525,1980 Q1.2 U2.3 | length 3978.4
  Top Layer w12: P1.4@1445.91,2000.32 1446.22,2000 v2(1490,2000)
  Top Layer w15: Q1.2@4040,1765.2 C5.1@4040,1734.53 4067.7,1734.53 U2.3@4095.65,1706.57 ; Q1.2@4051.06,1765.2 4051.26,1765 v2(4090,1765) ; v2(4530,1920) pad.@4530,1980
  Signal Layer 2 w12: v2(1490,2000) 1522,2032 2533,2032 2565,2000 2845,2000 2890,1955 3165,1955 3235,2025 3675,2025 3719.59,1980.41 3925.41,1980.41 3974,2029 4481,2029 4530,1980 v2(4530,1920)
  Bottom Layer w15: v2(4090,1765) 4095.5,1770.5 4380.5,1770.5 v2(4530,1920)
V_EXTERNAL: C44.1 D3.2 D13.1 Q1.3 Q12.6 | length 1026.9
  Top Layer w8: v2(4050,1800) 4052.6,1802.6 Q1.3@4133.74,1802.6 4147.6,1802.6 4185,1840 4240,1840 4250,1850 4250,1876.81 D13.1@4250.59,1877.4 D13.1@4250.59,1865.59
  Top Layer w12: Q12.6@4420.45,1665.59 Q12.6@4422.4,1665.59 4464.11,1665.59 C44.1@4468.05,1669.53
  Top Layer w15: D3.2@3886.48,1835 3921.48,1800 v2(4050,1800) ; C44.1@4470,1669.53 v2(4470,1695)
  Bottom Layer w15: v2(4050,1800) 4050,1735 4105,1680 4455,1680 v2(4470,1695)
V_HARVEST: C2.2 C15.1 C47.1 D1.2 L1.1 Q12.3 U1.5 U4.6 U12.1 | length 1462.3
  Top Layer w15: U4.6@3764.37,1591.1 3861,1591.1 L1.1@3863.05,1589.06
  Top Layer w20: L1.1@3863.05,1589.06 L1.1@3865,1589.06 ; D1.2@3881.48,1755 D1.2@3886.48,1750 3903.15,1733.33 C15.1@3903.15,1665 3865,1626.85 L1.1@3865,1589.06 ; U1.5@4104.9,1490 4003.52,1490 C2.2@4003.05,1489.53 ; C47.1@4273.05,1609.53 4274,1610.47 4341.71,1610.47 4345.65,1614.41 4345.65,1576.57 4331.48,1562.4 U12.1@4333.43,1562.4 4370.65,1562.4 4383.05,1550 4383.05,1430 4353.05,1400 3973.05,1400 3953.05,1420 3953.05,1475 3967.58,1489.53 C2.2@4003.05,1489.53 ; L1.1@3865,1589.06 3934,1589.06 4003.05,1520 C2.2@4003.05,1489.53
V_PROG: D1.1 D3.1 D10.2 P4.1 P5.1 Q1.1 R3.1 R19.1 | length 2706.6
  Top Layer w8: v1(2913.27,1993.27) D10.2@2950,1993.27 R19.1@2950,1967.72
  Top Layer w15: P5.1@2105,1990 2105,1995 cw(c2125,1995) 2125,2015 2180,2015 cw(c2180,1995) 2200,1995 2200,1910 cw(c2170,1910) 2170,1880 v2(2130,1880) ; R3.1@3740,1742.72 3785.69,1742.72 D1.1@3792.97,1750 D3.1@3792.97,1835 ; v2(3755,1835) D3.1@3792.97,1835 ; Q1.1@4051.06,1840 3985,1840 3940,1885 3800,1885 3795,1880 3795,1837.03 D3.1@3792.97,1835
  VCC w15: v2(2130,1880) 2195,1880 2240,1925 2845,1925 ; v1(2913.27,1993.27) 2845,1925 ; v2(3755,1835) 3745,1835 3675,1905 3225,1905 3205,1925 2845,1925
  Bottom Layer w15: P4.1@2105,1940 2130,1915 v2(2130,1880)
V_SELECTED: C45.1 C48.1 C50.1 Q12.1 Q12.4 R47.1 U11.6 U12.6 U13.6 | length 1016
  Top Layer w12: Q12.4@4420.45,1614.41 4420.45,1576.57 4434.63,1562.4 4442.22,1570 R47.1@4480.34,1570
  Top Layer w20: U13.6@4098.31,1955.59 4142.6,1955.59 C50.1@4143.31,1954.88 4167.64,1954.88 ccw(c4167.64,1972.36) 4180,1960 4180,2012.93 cw(c4197.07,2012.93) 4185,2025 4412.93,2025 cw(c4412.93,2007.93) 4425,2020 cw(c4412.93,2007.93) 4430,2007.93 4430,1829.53 C45.1@4400.47,1800 4397.17,1796.69 U11.6@4360.59,1796.69 4360.59,1750.12 4345.47,1735 C48.1@4345.47,1710 ; C48.1@4345.65,1707.87 4345.65,1665.59 Q12.1@4347.6,1665.59 4368.17,1665.59 4383.76,1650 4383.76,1629.3 4398.64,1614.41 Q12.4@4420.45,1614.41
VCAP: C9.1 C10.1 C11.1 C12.1 C13.1 C14.1 P2.3 P3.3 pad.@4535,1270 R36.1 U4.4 | length 4890.7
  Top Layer w8: 1435,1595 1435,1710 1562.72,1837.72 R36.1@1935,1837.72
  Top Layer w12: U4.4@3744.68,1478.9 3744.68,1455.32 3780,1420 C14.1@3789.53,1420
  Top Layer w20: P2.3@1272.36,1273.27 v2(1383.27,1273.27) 1435,1325 1435,1595 1416.73,1613.27 P3.3@1272.36,1613.27 ; v2(3750,1245) C10.1@3750,1330 3789.53,1369.53 C14.1@3789.53,1420 ; C13.1@4470,1330 4470,1275 v2(4475,1270)
  Top Layer w40: C10.1@3750,1330 C9.1@3930,1330 C11.1@4110,1330 C12.1@4290,1330 C13.1@4470,1330
  VCC w20: v2(1383.27,1273.27) 1675,1273.27 1758.27,1190 2135,1190 2235,1290 2624,1290 2649,1315 3680,1315 v2(3750,1245)
  Bottom Layer w20: v2(4475,1270) pad.@4535,1270
VCAP_LOOPBACK: P2.4 P3.4 Q10.2 R43.1 | length 1279.4
  Top Layer w8: R43.1@2000,1280 2010,1290 Q10.2@2037.6,1290
  Top Layer w12: P2.4@1270,1059.09 ccw(c1270,1069.09) 1280,1069.09 1280,1205 ccw(c1265,1205) 1265,1220 1225,1220 cw(c1225,1235) 1217.06,1222.28 cw(c1225,1235) 1210,1235 1210,1334.37 cw(c1272.36,1334.37) P3.4@1272.36,1396.73 1274.09,1395 v2(1350,1395) ; v1(1995,1260) R43.1@1995,1282.28
  Bottom Layer w12: v2(1350,1395) 1485,1260 v1(1995,1260)
VCC_GATED1: C24.1 C25.1 C26.1 Q15.2 Q15.3 R28.1 R30.1 U8.8 U9.5 | length 1258.5
  Top Layer w12: v2(3085,1505) 3087.28,1507.28 R30.1@3087.28,1530 ; U8.8@3203.39,1312.32 3229.96,1312.32 C25.1@3237.28,1305 ; C26.1@3225.47,1260 3237.28,1271.81 C25.1@3237.28,1305 ; R28.1@3232.72,1675 3232.72,1655 U9.5@3213.31,1635.59 3257.87,1635.59 C24.1@3260,1637.72 3262.72,1635 3280,1635 3290,1625 ; Q15.3@3552.6,1824.41 3525.59,1824.41 3525,1825 ; Q15.2@3552.6,1850 3525,1850 3525,1825 ; C25.1@3237.28,1305 3237.28,1322.28 3260,1345 3260,1460 3290,1490 v1(3290,1505) 3290,1625 ; 3290,1625 3290,1745 3320,1775 3475,1775 3525,1825
  Bottom Layer w12: v2(3085,1505) v1(3290,1505)
VCC_GATED2: C20.1 C21.1 C22.1 Q14.2 Q14.3 U6.12 U7.7 | length 714.3
  Top Layer w12: U7.7@3117.68,1787.8 3164.92,1787.8 C22.1@3170,1782.72 3236.81,1782.72 C21.1@3240,1779.53 3265.47,1805 3460,1805 3485,1830 3485,1937.28 C20.1@3488.31,1940.59 ; U6.12@3431.14,1940.59 C20.1@3488.31,1940.59 ; Q14.2@3550.2,1955 3520,1955 3520,1930 3549.61,1930 3550.2,1929.41 3502.87,1929.41 C20.1@3490,1942.28 C20.1@3488.31,1940.59
VCC_MCU: C17.1 C18.1 C29.1 C31.1 C32.1 C33.1 C34.1 C35.1 C36.1 C39.1 C40.1 C46.1 pad.@4535,1670 Q13.4 R17.2 R37.1 R40.1 R41.2 R42.1 R48.1 U5.3 U5.7 U5.8 U10.10 U10.15 U10.24 U10.33 U10.36 U10.39 U10.40 U10.41 U10.43 U10.55 U11.1 Y1.2 | length 1240.6
  Top Layer w8: v1(1995,1220) R37.1@2017.28,1220 ; v1(2070,1400) 2087.28,1382.72 R41.2@2110,1382.72 ; C36.1@2137.72,1535 2165,1535 v1(2165.79,1535.79) U10.24@2196.46,1535.79 ; v1(2150,1255) R42.1@2150,1277.28 ; C34.1@2195,1762.28 v1(2195,1730) 2195,1714.41 U10.15@2196.46,1712.95 ; C17.1@2250,1892.28 2251.61,1893.9 2286.1,1893.9 ; C29.1@2285,1362.72 v1(2285,1385) 2285,1389.8 2300.79,1405.59 U10.33@2300.79,1431.46 U10.33@2300,1430.67 ; U10.10@2301.1,1738.86 U10.10@2300.79,1738.54 2300.79,1764.21 v1(2300,1765) 2305,1770 2305,1827.72 C32.1@2307.28,1830 ; v1(2313.23,1866.77) U5.8@2313.23,1893.9 2286.1,1893.9 ; U5.7@2313.23,1931.3 2291.3,1931.3 2286.1,1926.1 2286.1,1893.9 ; C31.1@2350,1377.72 2360,1387.72 v1(2360,1405) 2360,1431.3 U10.36@2359.84,1431.46 ; U10.39@2418.9,1431.46 2418.9,1411.1 2423.58,1406.42 v1(2438.58,1406.42) ; U10.40@2438.58,1431.46 v1(2438.58,1406.42) ; U10.41@2458.27,1431.46 2458.27,1413.27 2451.42,1406.42 v1(2438.58,1406.42) ; U5.3@2466.77,1968.7 v1(2493.7,1968.7) ; C35.1@2470,1377.72 2430,1377.72 2430,1397.83 v1(2438.58,1406.42) ; U10.43@2503.54,1457.05 2503.54,1421.46 2517.5,1407.5 v1(2527.5,1407.5) 2535,1400 C39.1@2535,1387.72 ; U10.55@2503.54,1693.27 2523.27,1693.27 v1(2535,1705) 2535,1727.72 C40.1@2537.28,1730 ; C18.1@2555,1952.28 2595.91,1952.28 Y1.2@2596.69,1951.5 v1(2623.5,1951.5) ; v1(2580,2025) 2594.57,2025 R17.2@2599.57,2020 ; v2@3697.72,1697.28 v2(3700,1695) ; R40.1@3715,2002.72 v1(3715,2025)
  Top Layer w12: Q13.4@3627.4,1689.41 3662.13,1689.41 R48.1@3670,1697.28 v2@3697.72,1697.28
  Top Layer w15: U11.1@4360.59,1883.31 4397.17,1883.31 C46.1@4400,1880.47 ; 4400,1915 C46.1@4400,1880.47 ; C46.1@4400.47,1880 C46.1@4400,1880.47
  Bottom Layer w8: pad.@4535,1670 v2(4535,1705)
  other v2: 4240,1935 4330,1935 4285,1980 4375,1980
VCC_SENSE: C49.1 pad.@4535,1570 Q14.4 Q15.4 R50.1 R51.1 U10.23 U13.1 | length 3997.6
  Top Layer w6: v1(2140,1565) 2153.45,1565 2162.97,1555.47 U10.23@2196.46,1555.47
  Top Layer w12: Q15.4@3627.4,1824.41 3662.13,1824.41 R51.1@3670,1832.28 3697.28,1832.28 3705,1840 v2@3705,1931.18 ; Q14.4@3627.4,1929.41 R50.1@3670,1929.41 ; R50.1@3670,1932.28 v2(3703.9,1932.28) v2@3705,1931.18 ; v2(4045,2005) 4014.84,2005 C49.1@4014.25,2004.41 4011.69,2001.85 U13.1@4011.69,1955.59 3995.59,1955.59 3945,1905 3731.18,1905 v2@3705,1931.18
  Signal Layer 2 w12: v1(2140,1565) 2103,1528 2103,1452 2206,1349 3544,1349 3626.11,1431.11 3626.11,1850 3703.9,1927.79 v2(3703.9,1932.28)
  Bottom Layer w12: v2(4045,2005) 4070,2030 4540,2030 4583,1987 4583,1618 pad.@4535,1570
VOLTAGE_WAVEFORM: R34.2 U8.7 U9.4 | length 356.2
  Top Layer w12: R34.2@3187.72,1265 3177.8,1274.92 U8.7@3177.8,1312.32 3177.8,1377.8 3235,1435 3235,1562.72 U9.4@3213.31,1584.41
VOLTAGEMEASUREEN: Q15.5 R53.1 U10.14 | length 1886
  Top Layer w8: U10.14@2222.05,1738.54 2222.05,1840 2247.05,1865 v1(2250,1865) ; R53.1@3602.28,1785 3600,1787.28 v1(3600,1855) 3605,1850 Q15.5@3627.4,1850
  Bottom Layer w8: v1(2250,1865) 2250,1900 2281.5,1931.5 2881.5,1931.5 2985,2035 3600,2035 3630,2005 3630,1885 v1(3600,1855)
VOLTAGESENSEIN: pad.@3150,1130 R31.2 U8.5 | length 243.6
  Top Layer w12: R31.2@3075,1312.28 U8.5@3126.61,1312.32 U8.5@3126.61,1312.32 3126.61,1153.39 pad.@3150,1130
VOLTAGETRIGGER: pad.@4535,1470 R29.2 U9.1 U10.12 | length 2850.6
  Top Layer w8: U10.12@2261.42,1738.54 2261.1,1738.86 2261.1,1811.1 2285,1835 v1(2285,1865)
  Top Layer w12: R29.2@3080,1622.72 3092.28,1635 3126.1,1635 U9.1@3126.69,1635.59 3126.69,1658.31 v1(3125,1660)
  Bottom Layer w12: v1(2285,1865) 2285,1835 2260,1810 2260,1765 2285,1740 2400,1740 2444.05,1784.05 3095.95,1784.05 3125,1755 v1(3125,1660) 3145,1640 3575,1640 3790,1425 4450,1425 4495,1470 pad.@4535,1470
VREF: R30.2 R32.1 U8.3 | length 89
  Top Layer w12: R30.2@3122.72,1530 R32.1@3157.28,1530 3152.2,1524.92 U8.3@3152.2,1477.68
VREF_BUF: R31.1 U7.5 U8.1 U8.2 U10.20 | length 2062.4
  Top Layer w8: v1(2085,1700) 2170.47,1614.53 U10.20@2196.46,1614.53
  Top Layer w12: 3055,1673.94 3055,1367.72 R31.1@3075,1347.72 3107.72,1347.72 3180,1420 v2(3180,1430) ; 3055.53,1674.47 U7.5@3117.68,1736.61 ; 3177.8,1442.2 U8.2@3177.8,1477.68 ; v2@3185,1435 3200,1435 3203.39,1438.39 U8.1@3203.39,1477.68
  Signal Layer 2 w12: v1(2085,1700) 2205.79,1579.21 2205.79,1499.21 2275,1430 v2(3180,1430)
pads on no net: ANT1. D9.2 D9.5 P1. P2. P3. P4. P5. Q11.3 Q11.4 Q11.5 SW4. U3.9 U3.11 U3.27 U5.9 U6.7 U6.8 U6.9 U10.2 U10.3 U10.4 U11.2 U11.5 U13.2 U13.5 Y1.7

## Polygon pours and split planes (outlines as drawn)
VCC_MCU on Top Layer "VCC_MCU_L1" (solid, pour order 0): 4415,1865 4415,2010 4365,2010 4200,2010 4200,1865
GND on Top Layer "GND-L1" (solid, pour order 8): 1890,994.99 3670,994.99 3670,1360 3670,2055.01 2650,2055.01 2650,1360 1890,1360 1890,1260
BATTERYPACKPOWER on VCC "VCC_BATT_L4" (solid, pour order 2): 1795,1725 1795,1320 1920,1320 2130,1530 2130,1725
VCC_MCU on VCC "VCC-MCU-L4" (solid, pour order 6): 1000,1000 1000,2050 4600,2050 4600,1000
GND on GND "GND-L2" (solid, pour order 4): 1000,1000 1000,2050 1215,2050 4600,2050 4600,1000
GND on GND (Mid4) "GND-L5" (solid, pour order 10): 1000,1000 1000,2050 1080,2050 4600,2050 4600,1000

## Keep-outs
Keep-Out Layer:
  lines w10: 1000,2048.98 1001.02,2050 ; 1000,1000 4600,1000 4600,2050 1000,2050 1000,1925.51 1127.01,1925.51 1127.01,1791.65 1000,1791.65 1000,1545 1059.76,1545 1059.76,1465 1000,1465 1000,1205 1059.76,1205 1059.76,1125 1000,1125 1000,1000

## Other copper
Top Layer:
  pour cut-out: 3795,1590 3795,1470 3935,1470 3935,1590
  pour cut-out: 1001.02,1925.51 1001.02,1791.65 1127.01,1791.65 1127.01,1925.51
  pour cut-out: 1480,1000 1480,1145 2815,1145 2815,1000
GND:
  pour cut-out: 3795,1590 3795,1470 3935,1470 3935,1590
  pour cut-out: 1001.02,1925.51 1001.02,1791.65 1127.01,1791.65 1127.01,1925.51
  pour cut-out: 1480,995 1480,1140 2815,1140 2815,995
Signal Layer 2:
  pour cut-out: 3795,1590 3795,1470 3935,1470 3935,1590
  pour cut-out: 1001.02,1925.51 1001.02,1791.65 1127.01,1791.65 1127.01,1925.51
  pour cut-out: 1480,995 1480,1140 2815,1140 2815,995
VCC:
  pour cut-out: 3795,1590 3795,1470 3935,1470 3935,1590
  pour cut-out: 1001.02,1925.51 1001.02,1791.65 1127.01,1791.65 1127.01,1925.51
  pour cut-out: 1480,995 1480,1140 2815,1140 2815,995
GND (Mid4):
  pour cut-out: 3795,1590 3795,1470 3935,1470 3935,1590
  pour cut-out: 1001.02,1925.51 1001.02,1791.65 1127.01,1791.65 1127.01,1925.51
  pour cut-out: 1480,995 1480,1140 2815,1140 2815,995
Bottom Layer:
  pour cut-out: 3795,1590 3795,1470 3935,1470 3935,1590
  pour cut-out: 1001.02,1925.51 1001.02,1791.65 1127.01,1791.65 1127.01,1925.51
  pour cut-out: 1480,995 1480,1140 2815,1140 2815,995

## Silkscreen, mask and mechanical layers (free items; w line width, h text height)
Top Overlay:
  region: 1878.21,1022.58 1920.21,1022.58 1920.21,1045 1911.67,1045 1911.67,1065.29 1932.49,1036.1 1933.91,1036.1 1955.09,1065.29 1955.09,1045 1946.55,1045 1946.55,1022.58 1988.54,1022.58 1988.54,1045 1980,1045 1980,1078.81 1988.54,1078.81 1988.54,1101.23 1955.27,1101.23 1933.91,1071.69 1932.84,1071.69 1911.49,1101.23 1878.21,1101.23 1878.21,1078.81 1886.4,1078.81 1886.4,1045 1878.21,1045
  text "VBAT" at 4475,1895 h30
  text "BLDR" at 2080,1850 h30
  text "GND" at 4490,1735 h30
  text "Triumvi" at 2485,1085 h30
  text "Volt" at 3105,1040 h30
  text "B" at 2730,1035 h30
  text "W" at 3550,1035 h30
  text "V12,Kuo" at 2485,1020 h30
Bottom Overlay:
  text "JTAG" at 1910,1930 h30
  text "VCC_MCU" at 4490,1655 h30
  text "VCC_Sense" at 4490,1555 h30
  text "V_Phase" at 4485,1455 h30
  text "I_Wave" at 4490,1360 h30
  text "VCAP" at 4450,1255 h30
  text "GND" at 4455,1160 h30
Mechanical 14:
  lines w78.74: 960,950 960,1165 ; 960,2100 960,1880 1085,1880 1085,1835 960,1835 960,1505 ; 4640,950 4640,2100 ; 960,1165 960,1440 960,1505 ; 960,1165 1025,1165 960,1165 ; 960,1505 1020,1505 960,1505
Mechanical 16:
  lines w20: 900,990 4700,990 ; 900,2060 4700,2060

## Text inside footprints (layer, text, board x,y; h text height)
C19: Top Overlay "+" at 2799.49,1909.33 h48 r180
SW1: Top Overlay "8" at 1742.87,1807.32 h24 r180; Top Overlay "0" at 1723.19,1972.68 h24
SW2: Top Overlay "5" at 1667.87,1407.32 h24 r180; Top Overlay "0" at 1648.19,1572.68 h24
SW3: Top Overlay "5" at 1667.87,1087.32 h24 r180; Top Overlay "0" at 1648.19,1252.68 h24